# Altium PCB Bicikli_V1.PcbDoc (part 2 of 2)
Units mil, origin at the board's own origin, x right, y up, seen from the top; angles counter-clockwise.
Board outline 8366.14 x 3818.9 mil, 2 copper layers (Top Layer, Bottom Layer); 165 components, 79 nets, 501 pads, 940 vias.
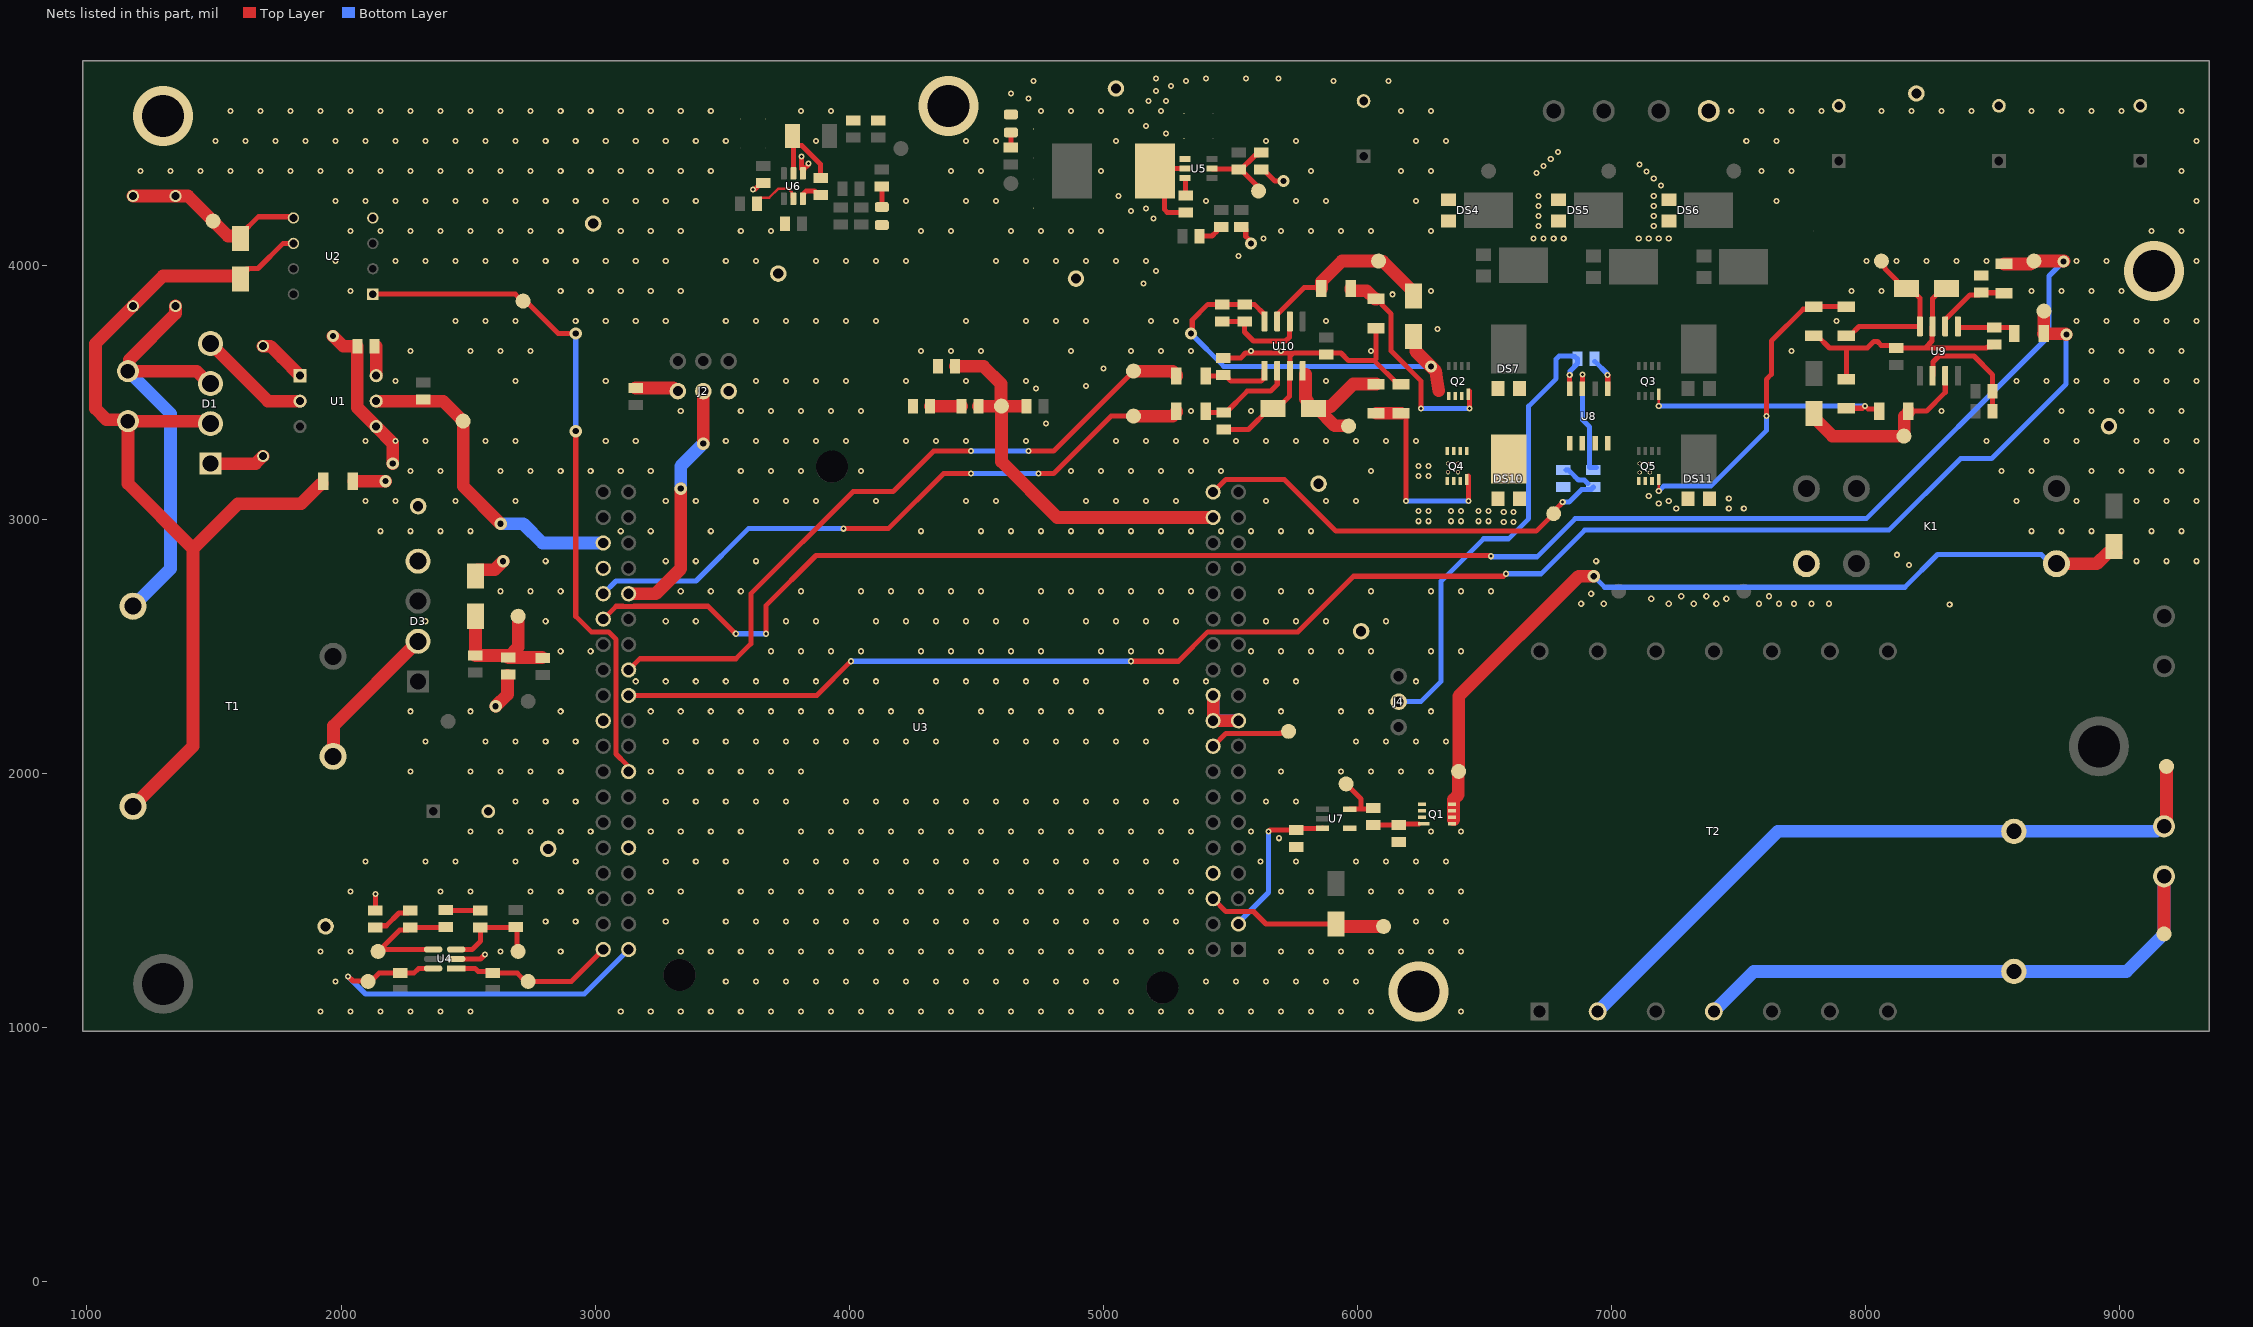
[diagram p2: the nets of this part, all layers, seen from the top]

## Via types
v1: diameter 24, hole 12, Top Layer to Bottom Layer, tented both sides, 820 vias
v2: diameter 24, hole 12, Top Layer to Bottom Layer, 55 vias
v3: diameter 48, hole 24, Top Layer to Bottom Layer, 52 vias
v4: diameter 17, hole 12, Top Layer to Bottom Layer, 8 vias
v5: diameter 236.22, hole 165.35, Top Layer to Bottom Layer, 4 vias
v6: diameter 48, hole 24, Top Layer to Bottom Layer, tented top, 1 vias

## Nets (pads, with @x,y where several pads share a name; then routed paths per layer and width w, separated by ;. In a path a pad name is that pad's centre, name@x,y a point inside that pad or via, vN(x,y) a via of type N, cw(c..) or ccw(c..) an arc to the next point about the centre after c; other vN are vias at no path point) (continued)
GND: C1.2 C3.1 C4.1 C5.1 C6.1 C8.1 C9.1 C11.1 C12.1 C13.1 C14.2 C15.2 C16.2 C21.1 C22.1 C23.1 C24.1 C25.1 C26.1 C27.1 C28.1 C30.1 C31.1 C32.1 C33.2 D3.4 D4.1 D7.1 D8.1 DS4.1 DS4.2 DS5.1 DS5.2 DS6.1 DS6.2 DS10.1 DS10.2 DS11.1 DS11.2 J2.3 J6.2 LED1.1 LED2.1 pad.0@1938.98,1397.64 pad.0@2303.15,3051.18 pad.0@2814.96,1702.76 pad.0@2992.13,4163.39 pad.0@3720.47,3966.54 pad.0@4891.73,3946.85 pad.0@5049.21,4694.88 pad.0@5846.46,3139.76 pad.0@6013.78,2559.06 pad.0@8198.82,4675.2 pad.0@8956.69,3366.14 Q1.1 Q1.2 Q1.3 Q4.1 Q4.2 Q4.3 Q5.1 Q5.2 Q5.3 R2.1 R6.1 R14.1 R17.1 R22.1 R23.1 R28.1 R31.1 R34.1 R35.1 R36.1 R39.1 R40.1 R47.1 R48.1 U1.4 U2.4 U3.CN7_8 U3.CN7_19 U3.CN7_20 U3.CN7_22 U3.CN10_9 U3.CN10_20 U3.CN10_32 U4.2 U5.4 U6.1 U7.4 U8.5 U9.7 U10.7 | length 4630.1
  Top Layer w20: R14.1@2134.89,1459.6 2135.36,1460.07 v2@2135.36,1525.12 ; U4.2@2452.78,1269.69 2548.13,1269.69 v2@2565.85,1287.4 ; v1(3621,4297) 3621.77,4297.77 3627.49,4297.77 3652.56,4322.83 C13.1@3661.42,4322.83 ; v1(3811.53,4426.68) 3811.53,4378.83 3815.86,4374.49 U6.1@3818,4374.49 ; U6.1@3816.93,4360.43 3818,4361.5 U6.1@3818,4374.49 ; v1(3838.58,4399.61) 3837.82,4398.84 3837.82,4392.96 3832.15,4387.29 3830.8,4387.29 U6.1@3818,4374.49 ; C23.1@5471.5,3634.8 5540.31,3634.8 5559.06,3653.54 5745.38,3653.54 ; C24.1@5473.38,3353.39 5570.64,3353.39 5652.28,3435.04 D8.1@5668.03,3435.04 5683.78,3435.04 5732.28,3483.54 5732.28,3582.48 U10.7@5733.66,3583.86 5733.66,3641.83 5745.38,3653.54 ; R23.1@5541.28,4149.64 5550.13,4149.64 5559.82,4139.95 5559.82,4113.11 v3@5580.71,4092.22 ; R22.1@5620.02,4376.02 5628.87,4376.02 5674.18,4330.71 v3(5708.66,4330.71) ; R39.1@6072.83,3751.57 6072.83,3630.91 6065.94,3624.02 ; R47.1@6171.26,3531.89 6158.07,3531.89 6065.94,3624.02 ; v2(6984,3568) 6984.22,3567.78 6984.22,3512.99 U8.5@6984.45,3512.76 ; R48.1@7795.28,3721.73 7808.46,3721.73 7856.97,3673.23 7921.26,3673.23 ; R40.1@7923.23,3551.57 7923.23,3671.26 7921.26,3673.23 ; D7.1@8318.19,3907.48 8302.44,3907.48 8262.4,3867.44 U9.7@8262.4,3758.66 8260.59,3756.85 8260.59,3701.54 8233.46,3674.41 ; C22.1@8504.87,3688.04 8495.19,3678.35 8478.56,3678.35 8474.61,3674.41 8233.46,3674.41 ; 5745.38,3653.54 5935.04,3653.54 C27.1@5964.57,3624.02 6065.94,3624.02 ; 7921.26,3673.23 8005.91,3673.23 C28.1@8031.5,3698.82 8045.87,3698.82 8060.6,3684.09 8109.46,3684.09 C25.1@8119.14,3674.41 8233.46,3674.41
  Top Layer w50: v3(1968.5,3720.47) 2008.81,3680.17 R2.1@2064.02,3680.17 2064.02,3438.73 U1.4@2138.19,3364.57 2138.19,3364.16 2203.41,3298.94 v3(2203.41,3219.08) ; R6.1@2050,3149.49 v3@2175.08,3149.49 ; D4.1@2529.53,2776.85 2529.53,2792.6 2537.99,2801.06 2604.21,2801.06 v3(2637.8,2834.65) ; v3(2608.27,2263.78) 2654.87,2310.39 R17.1@2654.87,2385.28 ; U3.CN7_22@5431.5,2306.69 U3.CN7_20@5431.5,2206.69 U3.CN7_19@5531.5,2206.69
  Bottom Layer w20: C32.1@6932.04,3621.11 6933.02,3621.11 6983.23,3570.9 6983.23,3568.77 v2(6984,3568)
  Bottom Layer w50: U3.CN7_22@5431.5,2306.69 U3.CN7_20@5431.5,2206.69 U3.CN7_19@5531.5,2206.69
  other v1: 1919.29,1062.99 2037.4,1062.99 2155.51,1062.99 2273.62,1062.99 2391.73,1062.99 2509.84,1062.99 3100.39,1062.99 3218.5,1062.99 3336.61,1062.99 3454.72,1062.99 3572.83,1062.99 3690.94,1062.99 3809.05,1062.99 3927.16,1062.99 4045.28,1062.99 4163.39,1062.99 4281.5,1062.99 4399.61,1062.99 4517.72,1062.99 4635.83,1062.99 4753.94,1062.99 4872.05,1062.99 4990.16,1062.99 5108.27,1062.99 5226.38,1062.99 5344.49,1062.99 5462.6,1062.99 5580.71,1062.99 5698.82,1062.99 5816.93,1062.99 5935.04,1062.99 6053.15,1062.99 6407.48,1062.99 1978.35,1181.1 3513.78,1181.1 3631.89,1181.1 3750,1181.1 3868.11,1181.1 3986.22,1181.1 4104.33,1181.1 4222.44,1181.1 4340.55,1181.1 4458.66,1181.1 4576.77,1181.1 4694.88,1181.1 4812.99,1181.1 4931.1,1181.1 5049.21,1181.1 5403.54,1181.1 5521.65,1181.1 5639.76,1181.1 5757.87,1181.1 5875.98,1181.1 5994.09,1181.1 1919.29,1299.21 2037.4,1299.21 2627.95,1299.21 2864.17,1299.21 3336.61,1299.21 3454.72,1299.21 3572.83,1299.21 3690.94,1299.21 3809.05,1299.21 3927.16,1299.21 4045.28,1299.21 4163.39,1299.21 4281.5,1299.21 4399.61,1299.21 4517.72,1299.21 4635.83,1299.21 4753.94,1299.21 4872.05,1299.21 4990.16,1299.21 5108.27,1299.21 5226.38,1299.21 5344.49,1299.21 5698.82,1299.21 5816.93,1299.21 5935.04,1299.21 6053.15,1299.21 6171.26,1299.21 6289.37,1299.21 6407.48,1299.21 2805.12,1417.32 2923.23,1417.32 3277.56,1417.32 3513.78,1417.32 3631.89,1417.32 3750,1417.32 3868.11,1417.32 3986.22,1417.32 4104.33,1417.32 4222.44,1417.32 4340.55,1417.32 4458.66,1417.32 4576.77,1417.32 4694.88,1417.32 4812.99,1417.32 4931.1,1417.32 5049.21,1417.32 5167.32,1417.32 5285.43,1417.32 6230.31,1417.32 6348.42,1417.32 2037.4,1535.43 2391.73,1535.43 2509.84,1535.43 2746.06,1535.43 2864.17,1535.43 2982.28,1535.43 3218.5,1535.43 3336.61,1535.43 3572.83,1535.43 3690.94,1535.43 3809.05,1535.43 3927.16,1535.43 4045.28,1535.43 4163.39,1535.43 4281.5,1535.43 4399.61,1535.43 4517.72,1535.43 4635.83,1535.43 4753.94,1535.43 4872.05,1535.43 4990.16,1535.43 5108.27,1535.43 5226.38,1535.43 5344.49,1535.43 5580.71,1535.43 5698.82,1535.43 5816.93,1535.43 6053.15,1535.43 6171.26,1535.43 6289.37,1535.43 6407.48,1535.43 2096.46,1653.54 2332.68,1653.54 2450.79,1653.54 2687.01,1653.54 2923.23,1653.54 3277.56,1653.54 3395.67,1653.54 3513.78,1653.54 3750,1653.54 3868.11,1653.54 3986.22,1653.54 4104.33,1653.54 4222.44,1653.54 4340.55,1653.54 4458.66,1653.54 4576.77,1653.54 4694.88,1653.54 4812.99,1653.54 4931.1,1653.54 5049.21,1653.54 5167.32,1653.54 5285.43,1653.54 5617.61,1653.54 5757.87,1653.54 5994.09,1653.54 6112.2,1653.54 6230.31,1653.54 6348.42,1653.54 5690.95,1744.62 2509.84,1771.65 2627.95,1771.65 2746.06,1771.65 2864.17,1771.65 2982.28,1771.65 3218.5,1771.65 3336.61,1771.65 3454.72,1771.65 3572.83,1771.65 3809.05,1771.65 3927.16,1771.65 4045.28,1771.65 4163.39,1771.65 4281.5,1771.65 4399.61,1771.65 4517.72,1771.65 4635.83,1771.65 4753.94,1771.65 4872.05,1771.65 4990.16,1771.65 5108.27,1771.65 5226.38,1771.65 5344.49,1771.65 5580.71,1771.65 6289.37,1771.65 6407.48,1771.65 2687.01,1889.76 2805.12,1889.76 2923.23,1889.76 3277.56,1889.76 3395.67,1889.76 3513.78,1889.76 3631.89,1889.76 3750,1889.76 3986.22,1889.76 4104.33,1889.76 4222.44,1889.76 4340.55,1889.76 4458.66,1889.76 4576.77,1889.76 4694.88,1889.76 4812.99,1889.76 4931.1,1889.76 5049.21,1889.76 5167.32,1889.76 5285.43,1889.76 5639.76,1889.76 5757.87,1889.76 2273.62,2007.87 2509.84,2007.87 2627.95,2007.87 2746.06,2007.87 2864.17,2007.87 3218.5,2007.87 3336.61,2007.87 3454.72,2007.87 3572.83,2007.87 3690.94,2007.87 3809.05,2007.87 5698.82,2007.87 5935.04,2007.87 6053.15,2007.87 6171.26,2007.87 6289.37,2007.87 2332.68,2125.98 2568.9,2125.98 2687.01,2125.98 2805.12,2125.98 2923.23,2125.98 3277.56,2125.98 3395.67,2125.98 3513.78,2125.98 3631.89,2125.98 3750,2125.98 3868.11,2125.98 3986.22,2125.98 4104.33,2125.98 4222.44,2125.98 4340.55,2125.98 4576.77,2125.98 4694.88,2125.98 4812.99,2125.98 4931.1,2125.98 5049.21,2125.98 5167.32,2125.98 5994.09,2125.98 6112.2,2125.98 6230.31,2125.98 6348.42,2125.98 2273.62,2244.09 2509.84,2244.09 2864.17,2244.09 3218.5,2244.09 3336.61,2244.09 3454.72,2244.09 3572.83,2244.09 3690.94,2244.09 3809.05,2244.09 3927.16,2244.09 4045.28,2244.09 4163.39,2244.09 4281.5,2244.09 4517.72,2244.09 4635.83,2244.09 4753.94,2244.09 4872.05,2244.09 4990.16,2244.09 5226.38,2244.09 5344.49,2244.09 5698.82,2244.09 5935.04,2244.09 6053.15,2244.09 6289.37,2244.09 3159.45,2362.21 3277.56,2362.21 3395.67,2362.21 3513.78,2362.21 3631.89,2362.21 3750,2362.21 3868.11,2362.21 3986.22,2362.21 4104.33,2362.21 4340.55,2362.21 4458.66,2362.21 4576.77,2362.21 4694.88,2362.21 4812.99,2362.21 4931.1,2362.21 5167.32,2362.21 5285.43,2362.21 5403.54,2362.21 5639.76,2362.21 5757.87,2362.21 6230.31,2362.21 2864.17,2480.32 2982.28,2480.32 3690.94,2480.32 3809.05,2480.32 3927.16,2480.32 4045.28,2480.32 4281.5,2480.32 4399.61,2480.32 4517.72,2480.32 4635.83,2480.32 4753.94,2480.32 4990.16,2480.32 5108.27,2480.32 5226.38,2480.32 5580.71,2480.32 5698.82,2480.32 5816.93,2480.32 5935.04,2480.32 6053.15,2480.32 6289.37,2480.32 6407.48,2480.32 2332.68,2598.43 2805.12,2598.43 3277.56,2598.43 3395.67,2598.43 3750,2598.43 3868.11,2598.43 4104.33,2598.43 4222.44,2598.43 4340.55,2598.43 4458.66,2598.43 4576.77,2598.43 4694.88,2598.43 4931.1,2598.43 5049.21,2598.43 5167.32,2598.43 5285.43,2598.43 5639.76,2598.43 5757.87,2598.43 5875.98,2598.43 6112.2,2598.43 8330,2664 6879.92,2667.32 6968.5,2667.32 7224.41,2667.32 7322.83,2667.32 7411.42,2667.32 7578.74,2667.32 7657.48,2667.32 7716.54,2667.32 7785.43,2667.32 7854.33,2667.32 7155.51,2687.01 7450.79,2687.01 7273.62,2696.85 7372.05,2696.85 7618.11,2696.85 6919.29,2706.69 2627.95,2716.54 2746.06,2716.54 2864.17,2716.54 3336.61,2716.54 3454.72,2716.54 3572.83,2716.54 3809.05,2716.54 4045.28,2716.54 4163.39,2716.54 4281.5,2716.54 4399.61,2716.54 4517.72,2716.54 4753.94,2716.54 4872.05,2716.54 4990.16,2716.54 5108.27,2716.54 5226.38,2716.54 5344.49,2716.54 5698.82,2716.54 5816.93,2716.54 6053.15,2716.54 6289.37,2716.54 6407.48,2716.54 6525.59,2716.54 8169,2820 2805.12,2834.65 3277.56,2834.65 3395.67,2834.65 3631.89,2834.65 6938.98,2834.65 9064.96,2834.65 9183.07,2834.65 9301.18,2834.65 8122,2860 2155.51,2952.76 2273.62,2952.76 2391.73,2952.76 2509.84,2952.76 3100.39,2952.76 3218.5,2952.76 3454.72,2952.76 4281.5,2952.76 4517.72,2952.76 4635.83,2952.76 4753.94,2952.76 4872.05,2952.76 4990.16,2952.76 5108.27,2952.76 5226.38,2952.76 5344.49,2952.76 5462.6,2952.76 5580.71,2952.76 5698.82,2952.76 5816.93,2952.76 8651.57,2952.76 8769.68,2952.76 8887.79,2952.76 9124.01,2952.76 9242.12,2952.76 2096.46,3070.87 2214.57,3070.87 2450.79,3070.87 2687.01,3070.87 3277.56,3070.87 3395.67,3070.87 3631.89,3070.87 3750,3070.87 3868.11,3070.87 4104.33,3070.87 4458.66,3070.87 4576.77,3070.87 4931.1,3070.87 5049.21,3070.87 5167.32,3070.87 5285.43,3070.87 5639.76,3070.87 5875.98,3070.87 5994.09,3070.87 8592.52,3070.87 8828.74,3070.87 9064.96,3070.87 9183.07,3070.87 9301.18,3070.87 2273.62,3188.98 2391.73,3188.98 2627.95,3188.98 2746.06,3188.98 2864.17,3188.98 2982.28,3188.98 3100.39,3188.98 3218.5,3188.98 3572.83,3188.98 3690.94,3188.98 3809.05,3188.98 4045.28,3188.98 4872.05,3188.98 4990.16,3188.98 5108.27,3188.98 5226.38,3188.98 5344.49,3188.98 5462.6,3188.98 6053.15,3188.98 8533.46,3188.98 8651.57,3188.98 8887.79,3188.98 9005.9,3188.98 9124.01,3188.98 9242.12,3188.98 2096.46,3307.09 2214.57,3307.09 2332.68,3307.09 2568.9,3307.09 2687.01,3307.09 3041.34,3307.09 3159.45,3307.09 3513.78,3307.09 3631.89,3307.09 3750,3307.09 3868.11,3307.09 3986.22,3307.09 4222.44,3307.09 4340.55,3307.09 4458.66,3307.09 4694.88,3307.09 5049.21,3307.09 5167.32,3307.09 5285.43,3307.09 5403.54,3307.09 5521.65,3307.09 5639.76,3307.09 5757.87,3307.09 5875.98,3307.09 5994.09,3307.09 6112.2,3307.09 6230.31,3307.09 8474.41,3307.09 8710.63,3307.09 8828.74,3307.09 9064.96,3307.09 9183.07,3307.09 9301.18,3307.09 4773.62,3375.98 3336.61,3425.2 3572.83,3425.2 3690.94,3425.2 3809.05,3425.2 3927.16,3425.2 4045.28,3425.2 5344.49,3425.2 5580.71,3425.2 8297.24,3425.2 8769.68,3425.2 8887.79,3425.2 9005.9,3425.2 9124.01,3425.2 9242.12,3425.2 4734.25,3513.78 4931.1,3523.62 2214.57,3543.31 2687.01,3543.31 3041.34,3543.31 3631.89,3543.31 3750,3543.31 3868.11,3543.31 3986.22,3543.31 4222.44,3543.31 4458.66,3543.31 4694.88,3543.31 5875.98,3543.31 8592.52,3543.31 8710.63,3543.31 8828.74,3543.31 8946.85,3543.31 9064.96,3543.31 9183.07,3543.31 9301.18,3543.31 5000,3592.52 2273.62,3661.42 2509.84,3661.42 2627.95,3661.42 2746.06,3661.42 4281.5,3661.42 4399.61,3661.42 4517.72,3661.42 4872.05,3661.42 5108.27,3661.42 5226.38,3661.42 5344.49,3661.42 5580.71,3661.42 5698.82,3661.42 6053.15,3661.42 7706.69,3661.42 8887.79,3661.42 9005.9,3661.42 9124.01,3661.42 9242.12,3661.42 6315,3749 2450.79,3779.53 2568.9,3779.53 2687.01,3779.53 2923.23,3779.53 3041.34,3779.53 3159.45,3779.53 3277.56,3779.53 3513.78,3779.53 3631.89,3779.53 3750,3779.53 3868.11,3779.53 3986.22,3779.53 4104.33,3779.53 4458.66,3779.53 4694.88,3779.53 4812.99,3779.53 4931.1,3779.53 5187.01,3779.53 5285.43,3779.53 5875.98,3779.53 7883.86,3779.53 8828.74,3779.53 8946.85,3779.53 9064.96,3779.53 9183.07,3779.53 9301.18,3779.53 6138,3885 2037.4,3897.64 2864.17,3897.64 2982.28,3897.64 3100.39,3897.64 3218.5,3897.64 3336.61,3897.64 6289.37,3897.64 7942.91,3897.64 8061.02,3897.64 8651.57,3897.64 8769.68,3897.64 8887.79,3897.64 9005.9,3897.64 5157.48,3927.17 5206.69,3976.38 1978.35,4015.75 2214.57,4015.75 2332.68,4015.75 2450.79,4015.75 2568.9,4015.75 2687.01,4015.75 2805.12,4015.75 2923.23,4015.75 3041.34,4015.75 3159.45,4015.75 3277.56,4015.75 3513.78,4015.75 3631.89,4015.75 3868.11,4015.75 3986.22,4015.75 4104.33,4015.75 4222.44,4015.75 4576.77,4015.75 4694.88,4015.75 4812.99,4015.75 4931.1,4015.75 5049.21,4015.75 5167.32,4015.75 8001.97,4015.75 8120.08,4015.75 8238.19,4015.75 8356.3,4015.75 8474.41,4015.75 8828.74,4015.75 8946.85,4015.75 9301.18,4015.75 5531.5,4035.43 5629.92,4104.33 6692.91,4104.33 6732.28,4104.33 6771.65,4104.33 6811.02,4104.33 7106.3,4104.33 7145.67,4104.33 7185.04,4104.33 7224.41,4104.33 2037.4,4133.86 2155.51,4133.86 2273.62,4133.86 2391.73,4133.86 2509.84,4133.86 2627.95,4133.86 2746.06,4133.86 2864.17,4133.86 3100.39,4133.86 3218.5,4133.86 3336.61,4133.86 3572.83,4133.86 3690.94,4133.86 4281.5,4133.86 4399.61,4133.86 4635.83,4133.86 4753.94,4133.86 4872.05,4133.86 4990.16,4133.86 5698.82,4133.86 5816.93,4133.86 5935.04,4133.86 6053.15,4133.86 6289.37,4133.86 9124.01,4133.86 9242.12,4133.86 6712.6,4153.54 7165.35,4153.54 5196.85,4183.07 6712.6,4192.91 7165.35,4192.91 5108.27,4212.6 5167.32,4222.44 6712.6,4232.28 7165.35,4232.28 1978.35,4251.97 2096.46,4251.97 2214.57,4251.97 2332.68,4251.97 2450.79,4251.97 2568.9,4251.97 2687.01,4251.97 2805.12,4251.97 2923.23,4251.97 3041.34,4251.97 3159.45,4251.97 3277.56,4251.97 3395.67,4251.97 4222.44,4251.97 4458.66,4251.97 4576.77,4251.97 5403.54,4251.97 5757.87,4251.97 5875.98,4251.97 6230.31,4251.97 7647.64,4251.97 9301.18,4251.97 5059.06,4271.65 6712.6,4271.65 7165.35,4271.65 7193.19,4312.71 7165.35,4340.55 6704.44,4361.92 7137.52,4368.39 1210.63,4370.08 1328.74,4370.08 1446.85,4370.08 1564.96,4370.08 1683.07,4370.08 1801.18,4370.08 1919.29,4370.08 2037.4,4370.08 2155.51,4370.08 2273.62,4370.08 2391.73,4370.08 2509.84,4370.08 2627.95,4370.08 2746.06,4370.08 2864.17,4370.08 2982.28,4370.08 3100.39,4370.08 3218.5,4370.08 3336.61,4370.08 3454.72,4370.08 4399.61,4370.08 4517.72,4370.08 4990.16,4370.08 5816.93,4370.08 6171.26,4370.08 6289.37,4370.08 7588.58,4370.08 7706.69,4370.08 9242.12,4370.08 6732.28,4389.76 7109.68,4396.23 6760.12,4417.6 6787.96,4445.44 1505.91,4488.19 1624.02,4488.19 1742.13,4488.19 1860.24,4488.19 1978.35,4488.19 2096.46,4488.19 2214.57,4488.19 2332.68,4488.19 2450.79,4488.19 2568.9,4488.19 2687.01,4488.19 2805.12,4488.19 2923.23,4488.19 3041.34,4488.19 3159.45,4488.19 3277.56,4488.19 3395.67,4488.19 3513.78,4488.19 3868.11,4488.19 4458.66,4488.19 4576.77,4488.19 5049.21,4488.19 5639.76,4488.19 5757.87,4488.19 6230.31,4488.19 6348.42,4488.19 7529.53,4488.19 7647.64,4488.19 9301.18,4488.19 5246.06,4517.72 5167.32,4547.24 1564.96,4606.3 1683.07,4606.3 1801.18,4606.3 1919.29,4606.3 2037.4,4606.3 2155.51,4606.3 2273.62,4606.3 2391.73,4606.3 2509.84,4606.3 2627.95,4606.3 2746.06,4606.3 2864.17,4606.3 2982.28,4606.3 3100.39,4606.3 3218.5,4606.3 3336.61,4606.3 3454.72,4606.3 3809.05,4606.3 3927.16,4606.3 4753.94,4606.3 4872.05,4606.3 4990.16,4606.3 5108.27,4606.3 5226.38,4606.3 6171.26,4606.3 6289.37,4606.3 7470.47,4606.3 7588.58,4606.3 7706.69,4606.3 7824.8,4606.3 8061.02,4606.3 8179.13,4606.3 8297.24,4606.3 8415.35,4606.3 8651.57,4606.3 8769.68,4606.3 8887.79,4606.3 9005.9,4606.3 9242.12,4606.3 5177.17,4645.67 5246.06,4645.67 4704.72,4655.51 4635.83,4675.2 5206.69,4685.04 5265.75,4704.72 4724.41,4724.41 5324.8,4724.41 5905.51,4724.41 6122.05,4724.41 5206.69,4734.25 5403.54,4734.25 5561.02,4734.25 5688.98,4734.25
  other v2: 2566.93,1287.4 2135.83,1525.59 6575,2989 6614,2989 6240.16,2992.13 6279.53,2992.13 6368.11,2992.13 6407.48,2992.13 6476.38,2992.13 6515.75,2992.13 6575,3028 6614,3028 6240.16,3031.5 6279.53,3031.5 6368.11,3031.5 6407.48,3031.5 6476.38,3031.5 6515.75,3031.5 7253.94,3041.34 7460.63,3041.34 7519.69,3041.34 7185.04,3061.02 7224.41,3070.87 7460.63,3080.71 7145.67,3090.55 6240.16,3169.29 6279.53,3169.29 6240.16,3208.66 6279.53,3208.66
  other v3: 2175.2,3149.61 5580.71,4084.65
  other v4: 7110,3184 7150,3184 6356,3185 6395,3185 6356,3219 6396,3219 7110,3219 7151,3219
  other v5: 6240.16,1141.73 9133.86,3976.38 1299.21,4586.61 4389.76,4625.98
GridTie: J2.2 U3.CN10_29 | length 981.4
  Top Layer w50: U3.CN10_29@3131.5,2706.69 3238.19,2706.69 3336.61,2805.12 v3(3336.61,3120.08) ; v3(3425.2,3297.24) J2.2@3425.2,3503.94
  Bottom Layer w50: v3(3336.61,3120.08) 3336.61,3208.66 v3(3425.2,3297.24)
HallIN+: C19.1 C20.1 D6.1 DS7.1 DS7.2 DS10.3 pad.5@6338.58,3375.98 Q2.1 Q2.2 Q2.3 Q4.5 Q4.6 Q4.7 Q4.8 U8.1 U8.2 U10.4 | length 1656.8
  Top Layer w20: v3(5344.49,3730.32) 5349.28,3735.1 5349.28,3784.32 5410.57,3845.61 C19.1@5467.37,3845.61 5593.37,3845.61 5633.66,3805.32 U10.4@5633.66,3778.35
  Top Layer w50: D6.1@6220.47,3719.21 6228.94,3710.75 6228.94,3660.83 6307.36,3582.4 6311.87,3553.47 6319,3506
  Bottom Layer w20: v3(5344.49,3730.32) 5473.43,3601.38 v3(6288.39,3601.38)
HallIN-: K1.4 U8.3 U8.4
HallSens: R33.1 R36.2 TP19.1 U3.CN7_38 | length 1797.8
  Top Layer w20: U3.CN7_38@5431.5,3106.69 5481.5,3156.69 5711.42,3156.69 5915.35,2952.76 6702.76,2952.76 6761.81,3011.81 6761.81,3021.65 6780.41,3021.65 6780.03,3022.04 6780.03,3038.79 6807.09,3065.85 v2(6807.09,3066.93)
  Bottom Layer w20: v2@6808.17,3066.93 6808.93,3067.69 6832.35,3067.69 6881.99,3117.33 6918.51,3117.33 R33.1@6928.2,3127.02 ; R36.2@6819.93,3193.95 6828.79,3193.95 6856.03,3166.7 6856.76,3166.7 6869.2,3154.26 6892.09,3154.26 R33.1@6905.72,3140.64
"HO L": D6.2 R37.1 TP21.1 U10.3 | length 735.3
  Top Layer w20: U10.3@5683.66,3778.35 5683.66,3805.32 5701.85,3823.5 5701.85,3823.68 5790.18,3912.01 R37.1@5857.87,3912.01
  Top Layer w50: R37.1@5857.87,3907.48 5857.87,3934.87 5938.75,4015.75 TP21.1@6082.68,4015.75 6084.41,4014.02 6100.16,4014.02 6220.47,3893.7 D6.2@6220.47,3877.95
"HO R": D5.2 R38.2 TP20.1 U9.3 | length 759.6
  Top Layer w20: R38.2@8167.72,3412.01 R38.2@8167.72,3425.2 8238.19,3425.2 8312.4,3499.41 U9.3@8312.4,3564.17
  Top Layer w50: D5.2@7795.28,3415.35 7795.28,3399.61 7868.11,3326.77 TP20.1@8149.61,3326.77 8151.34,3328.5 8151.34,3404.29 8167.72,3420.67 R38.2@8167.72,3425.2
"LO L": D8.2 R45.1 TP27.1 U10.8 | length 594.1
  Top Layer w50: U10.8@5795.28,3570.08 5795.28,3472.79 5802.56,3465.51 5802.56,3443.5 5811.02,3435.04 D8.2@5826.77,3435.04 5835.24,3443.5 5894.29,3443.5 5982.68,3531.89 R45.1@6072.83,3531.89 ; D8.2@5842.52,3435.04 5909.68,3367.87 5962.83,3367.87 TP27.1@5964.57,3366.14
"LO R": D7.2 R46.2 TP26.1 U9.8 | length 642.7
  Top Layer w20: R46.2@7923.23,3721.73 7936.42,3721.73 7973.35,3758.66 U9.8@8212.4,3758.66 8212.4,3870.28 8175.2,3907.48 8143.7,3907.48 8120.24,3930.94 8120.24,3940.79 8075.24,3985.78 8075.24,3990.96 8061.02,4005.18 TP26.1@8061.02,4015.75
NetC2_1: C2.1 U5.6 | length 77.9
  Top Layer w20: U5.6@5312.33,4342.52 U5.6@5320.87,4342.52 ; U5.6@5320.56,4342.52 5322.37,4340.71 5322.37,4276.06 C2.1@5323.87,4274.56
NetC2_2: C2.2 L1.2 U5.5 | length 378.7
  Top Layer w20: U5.5@5320.87,4379.92 5211.71,4379.92 L1.2@5201.87,4370.08 5239.32,4332.63 5239.32,4219.35 5251.03,4207.63 C2.2@5323.87,4207.63
NetC7_2: C7.2 U6.6 | length 98
  Top Layer w20: U6.6@3816.93,4261.61 3818.54,4263.23 3818.54,4279.62 3830.26,4291.34 3863.19,4291.34 3878,4276.53 C7.2@3886.86,4276.53
NetC17_2: C17.2 C18.2 U9.2 | length 473.8
  Top Layer w20: U9.2@8262.4,3564.17 8264.21,3565.98 8264.21,3618.54 8287.4,3641.73 8425.2,3641.73 8499.06,3567.87 C18.2@8499.06,3424.26
NetC19_2: C19.2 C20.2 U10.2 | length 390.5
  Top Layer w20: C19.2@5467.37,3778.68 5467.76,3778.3 5554.64,3778.3 C20.2@5555.02,3777.91 5555.02,3736.32 5590.55,3700.79 5716.63,3700.79 5731.85,3716.01 5731.85,3776.54 U10.2@5733.66,3778.35
NetC21_2: C21.2 R42.1 U9.6 | length 303.7
  Top Layer w20: U9.6@8312.4,3758.66 8312.4,3785.63 8330.59,3803.82 8330.59,3804 8409.58,3882.98 8444.1,3882.98 C21.2@8453.79,3892.67 8455.44,3891.02 8541.66,3891.02 R42.1@8543.31,3889.37
NetC22_2: C22.2 R41.1 U9.5 | length 242.4
  Top Layer w20: U9.5@8362.4,3758.66 8362.4,3756.78 8364.21,3754.97 C22.2@8504.87,3754.97 8572.79,3754.97 8584.25,3743.5 R41.1@8584.25,3730.32
NetC23_2: C23.2 R43.2 U10.5 | length 276.3
  Top Layer w20: R43.2@5401.97,3562.99 C23.2@5471.5,3562.99 ; C23.2@5471.5,3567.87 5480.36,3567.87 5490.05,3558.18 5490.05,3555.02 5501.76,3543.31 5620.13,3543.31 5631.85,3555.02 5631.85,3582.05 U10.5@5633.66,3583.86
NetC24_2: C24.2 R44.2 U10.6 | length 383
  Top Layer w20: R44.2@5401.97,3425.2 5406.84,3420.32 C24.2@5473.38,3420.32 5482.24,3420.32 5565.85,3503.94 5657.58,3503.94 5683.66,3530.02 U10.6@5683.66,3583.86
NetC29_1: C29.1 J8.1 T2.2 TP30.1 | length 2767.9
  Top Layer w50: J8.1@9173.23,1791.34 9180.23,1798.34 9180.23,1824.23 9183.07,1827.07 TP30.1@9183.07,2025.11
  Bottom Layer w50: T2.2@6944.88,1062.99 7653.54,1771.65 C29.1@8582.68,1771.65 9143.64,1771.65 9163.32,1791.34 J8.1@9173.23,1791.34
NetC29_2: C29.2 J8.2 T2.4 TP28.1 | length 2350.8
  Top Layer w50: TP28.1@9173.23,1368.11 J8.2@9173.23,1594.49
  Bottom Layer w50: T2.4@7401.57,1062.99 7559.06,1220.47 C29.2@8582.68,1220.47 9025.59,1220.47 9173.23,1368.11 J8.2@9173.23,1594.49
NetC32_2: C32.2 J4.2 U8.8 | length 1954.5
  Top Layer w20: U8.8@6834.45,3530.51 U8.8@6834.45,3512.76 6834.55,3512.86 v2@6834.55,3566.83
  Bottom Layer w20: J4.2@6161.42,2281.89 6248.43,2281.89 6328.74,2362.2 6328.74,2755.91 6496.06,2923.23 6594.49,2923.23 6673.23,3001.97 6673.23,3444.88 6781.5,3553.15 6781.5,3630.02 6793.21,3641.73 6844.49,3641.73 6846.57,3639.65 6855.43,3639.65 6865.11,3629.97 6865.11,3621.11 6865.11,3612.25 6835.41,3582.55 6835.41,3567.69 v2(6834.65,3566.93)
NetD1_1: D1.1 R1.2 | length 219.3
  Top Layer w50: D1.1@1485.87,3218.5 1663.39,3218.5 R1.2@1692.91,3248.03
NetD1_4: D1.4 U1.2 | length 446.5
  Top Layer w50: D1.4@1485.87,3690.94 1712.24,3464.57 U1.2@1838.19,3464.57
  Bottom Layer w50: U1.2@1837.9,3464.28 U1.2@1838.19,3464.57
NetD3_2: D3.2 T1.7 | length 591.2
  Top Layer w50: T1.7@1968.5,2066.93 1970.06,2068.48 1970.06,2186.95 D3.2@2302.8,2519.69
NetD4_2: D4.2 R15.1 R16.1 R17.2 TP9.1 | length 603.4
  Top Layer w50: D4.2@2529.53,2618.11 2529.06,2617.64 2529.06,2464 R15.1@2528.59,2463.54 R17.2@2666.39,2463.54 ; TP9.1@2696.85,2618.11 2696.85,2495.96 2658.42,2457.53 R17.2@2658.42,2455.76 R16.1@2790.8,2455.76
NetD9_2: D9.2 TP32.1 U3.CN7_6 | length 715.5
  Top Layer w20: U3.CN7_6@5431.5,1506.69 5481.5,1456.69 5590.55,1456.69 5639.76,1407.48 D9.2@5915.35,1407.48
  Top Layer w50: D9.2@5915.35,1406.1 5923.82,1397.64 TP32.1@6102.36,1397.64
NetJ2_1: J2.1 R5.1 | length 172
  Top Layer w50: R5.1@3158.51,3516.68 3308.39,3516.68 3321.14,3503.94 J2.1@3325.2,3503.94
NetLED1_2: LED1.2 R20.1 | length 59.1
  Top Layer w20: R20.1@4635.89,4462.57 LED1.2@4635.86,4521.62
NetLED2_2: LED2.2 R27.1 | length 80.1
  Top Layer w20: LED2.2@4128,4228.43 R27.1@4128,4308.5
NetQ1_4: Q1.4 R30.2 R31.2 | length 199.3
  Top Layer w10: Q1.4@6241.46,1801.18 Q1.4@6259.84,1801.18
  Top Layer w20: R30.2@6062.06,1796.21 6062.1,1796.26 6162.31,1796.26 6165.93,1799.88 Q1.4@6241.46,1799.88
NetQ2_4: Q2.4 R37.2 R39.2 | length 890.8
  Top Layer w20: R39.2@6072.83,3866.54 6086.02,3866.54 6096.69,3855.87 6096.69,3842.68 6131.89,3807.48 6131.89,3661.42 6250,3543.31 v2(6250,3435.04) ; v2(6440,3435) Q2.4@6440,3503.61
  Top Layer w50: R37.2@5972.83,3907.48 5972.83,3902.95 5977.17,3898.62 6036.22,3898.62 6068.31,3866.54 R39.2@6072.83,3866.54
  Bottom Layer w20: v2(6250,3435.04) v2(6440,3435)
NetQ3_4: Q3.4 R38.1 R40.2 | length 997.5
  Top Layer w10: Q3.4@7184.06,3490.95 7184.06,3474.45 7185,3473.51 v2(7185,3445)
  Top Layer w20: R40.2@7923.23,3436.61 7986.71,3436.61 v2@7994.98,3444.88 ; v2(7996.06,3444.88) 7997.15,3444.88 8007.81,3434.21 8043.74,3434.21 R38.1@8052.76,3425.2
  Bottom Layer w20: v2(7185,3445) 7185.06,3444.94 7996,3444.94 v2(7996.06,3444.88)
NetQ4_4: Q4.4 R45.2 R47.2 | length 802.4
  Top Layer w20: R47.2@6171.26,3416.93 6180.28,3416.93 6190.94,3406.26 v2(6190.94,3070.87) ; v2(6437.01,3070.87) 6437.01,3169.29
  Top Layer w50: R45.2@6072.83,3416.93 R47.2@6171.26,3416.93
  Bottom Layer w20: v2(6190.94,3070.87) v2(6437.01,3070.87)
NetQ5_4: Q5.4 R46.1 R48.2 | length 1280.5
  Top Layer w10: Q5.4@7184.06,3156.3 7184.55,3155.81 7184.55,3110.73 v2(7185.04,3110.24)
  Top Layer w20: v2(7608.27,3405.51) 7608.27,3550.2 7627.95,3569.88 7627.95,3700.79 7753.19,3826.02 7784.61,3826.02 R48.2@7795.28,3836.69 R46.1@7923.23,3836.69
  Bottom Layer w20: v2(7185.04,3110.24) 7204.72,3129.92 7389.76,3129.92 7608.27,3348.43 v2(7608.27,3405.51)
NetR1_1: R1.1 U1.1 | length 193.5
  Top Layer w50: R1.1@1692.91,3681.1 1721.65,3681.1 1766.73,3636.03 U1.1@1838.19,3564.57
NetR2_2: R2.2 U1.6 | length 116.1
  Top Layer w50: U1.6@2138.19,3564.97 R2.2@2138.19,3681.1
NetR8_1: R8.1 R11.2 TP4.1 U4.3 | length 401.8
  Top Layer w20: U4.3@2452.78,1307.09 2515.75,1307.09 2548.28,1339.61 R11.2@2548.28,1392.67 2549.31,1393.7 2686.91,1393.7 R8.1@2687.94,1394.73 2692.4,1390.28 2692.4,1303.67 TP4.1@2696.85,1299.21
NetR11_1: R11.1 R12.2 | length 136.8
  Top Layer w20: R12.2@2412.35,1461.66 2413.39,1460.63 2547.24,1460.63 R11.1@2548.28,1459.6
NetR12_1: R12.1 R13.2 TP7.1 U4.4 | length 515.2
  Top Layer w20: TP7.1@2145.67,1299.21 TP7.1@2153.54,1307.09 ; U4.4@2362.2,1307.09 2176.91,1307.09 2176.51,1306.69 2153.94,1306.69 TP7.1@2153.54,1307.09 ; R12.1@2412.35,1394.73 2411.32,1393.7 2273.72,1393.7 R13.2@2272.68,1392.67 2263,1382.98 2229.44,1382.98 TP7.1@2153.54,1307.09
NetR13_1: R13.1 R14.2 | length 165.5
  Top Layer w20: R14.2@2134.89,1392.67 2142.55,1400.33 2177.89,1400.33 2227.47,1449.91 2263,1449.91 R13.1@2272.68,1459.6
NetR18_1: R18.1 R22.2 TP12.1 U5.2 | length 363.8
  Top Layer w10: TP12.1@5600.85,4315.46 5600.85,4300.72 TP12.1@5610.24,4291.34
  Top Layer w20: U5.2@5427.17,4379.92 5428.98,4378.11 5529.34,4378.11 R18.1@5531.43,4376.02 R18.1@5540.29,4376.02 ; TP12.1@5610.24,4291.34 5602.76,4298.81 5602.76,4313.54 R18.1@5540.29,4376.02 ; R22.2@5620.02,4442.94 5610.33,4433.26 5598.26,4433.26 5568.26,4403.26 5567.54,4403.26 R18.1@5540.29,4376.02
NetR19_1: R19.1 R21.1 | length 104.5
  Top Layer w20: R19.1@5377.92,4114.11 5427.01,4114.11 5443.99,4131.09 5443.99,4139.95 5453.68,4149.64 R21.1@5462.54,4149.64
NetR24_1: R24.1 U6.5 | length 201.5
  Top Layer w10: R24.1@3635.8,4242.06 3635.8,4250.92 3650.48,4265.61 3684.9,4265.61 3720.51,4301.22 3759.8,4301.22 3772.91,4288.11 3772.91,4268.23 U6.5@3779.53,4261.61
NetR30_1: R30.1 TP15.1 U7.5 | length 219.3
  Top Layer w20: TP15.1@5954.72,1958.66 6014.07,1899.32 6014.07,1858.87 ; U7.5@5969.35,1857.87 5970.35,1858.87 6014.07,1858.87 ; R30.1@6062.06,1863.14 6057.78,1858.87 6014.07,1858.87
NetR32_1: R32.1 R35.2 | length 123.4
  Top Layer w50: R35.2@4317.96,3443.94 4318.43,3444.41 4440.48,3444.41 R32.1@4440.94,3444.88
NetR33_2: R33.2 U8.7 | length 461.6
  Top Layer w20: U8.7@6884.45,3512.76 6884.55,3512.86 6884.55,3569.94 v2(6884.65,3570.04)
  Bottom Layer w20: v2(6884.65,3570.04) 6884.65,3390.94 6913.2,3362.39 6913.2,3203.63 R33.2@6939.18,3203.63
NetTP33_1: TP33.1 U3.CN7_18 | length 321.8
  Top Layer w20: U3.CN7_18@5431.5,2106.69 5482.28,2157.48 5510,2157.48 5510.79,2156.69 5552.21,2156.69 5552.99,2157.48 5697.1,2157.48 5697.5,2157.88 5720.87,2157.88 TP33.1@5728.35,2165.35
NULA: D1.2 D2.1 J1.1 R6.2 R7.1 T1.5 U2.6 | length 4028.8
  Top Layer w20: D2.1@1604.33,3945.59 1604.33,3961.34 1627.8,3984.8 1638.09,3984.8 1639.51,3986.22 1673.23,3986.22 1772.44,4085.43 U2.6@1812.2,4085.43
  Top Layer w50: T1.5@1181.1,1870.08 1186.23,1870.08 1191.77,1875.62 1191.77,1880.74 1417.32,2106.3 1417.32,2883.86 ; D1.2@1485.87,3375.98 1480.22,3375.98 1470.38,3385.83 J1.1@1161.42,3385.83 ; D2.1@1606.3,3956.69 1299.21,3956.69 R7.1@1181.1,3838.58 1033.46,3690.95 1033.46,3435.04 1077.18,3391.33 1155.92,3391.33 J1.1@1161.42,3385.83 ; R6.2@1926.38,3140.75 1922.05,3136.42 1918.08,3136.42 1842.69,3061.02 1594.49,3061.02 1417.32,2883.86 ; J1.1@1161.42,3385.83 1161.42,3139.76 1417.32,2883.86
OV: R10.1 TP6.1 U3.CN10_1 U4.6 | length 1567.8
  Top Layer w20: v2@2028.64,1200.79 2046.77,1182.66 2104.74,1182.66 TP6.1@2106.3,1181.1 2116.87,1181.1 2149.3,1213.54 R10.1@2233.32,1213.54 2286.37,1213.54 2305.12,1232.28 U4.6@2362.2,1232.28
  Bottom Layer w20: v2(2027.56,1200.79) 2096.46,1131.89 2956.69,1131.89 U3.CN10_1@3131.5,1306.69
Phase: D1.3 J1.2 R4.2 T1.1 | length 1733.9
  Top Layer w50: R4.2@1348.43,3838.58 1348.43,3809.06 1166.92,3627.55 1166.92,3588.18 J1.2@1161.42,3582.68 1431.01,3582.68 1480.22,3533.46 D1.3@1485.87,3533.46
  Bottom Layer w50: J1.2@1161.42,3582.68 1328.74,3415.35 1328.74,2805.12 T1.1@1181.1,2657.48
Phase_ADC: D2.2 R4.1 R7.2 TP2.1 U2.5 | length 758.4
  Top Layer w20: D2.2@1604.33,4104.33 1604.33,4120.08 1674.37,4190.12 1807.52,4190.12 U2.5@1812.2,4185.43
  Top Layer w50: R7.2@1181.1,4271.65 1338.58,4271.65 1397.64,4271.65 TP2.1@1496.06,4173.23 1555.12,4114.17 D2.2@1606.3,4114.17 ; D2.2@1604.33,4104.33 1604.33,4105.71 D2.2@1612.8,4114.17
Relay: DS9.1 K1.1 Q1.5 Q1.6 Q1.7 Q1.8 TP34.1 | length 3403.7
  Top Layer w50: 6377.33,1817.71 6377.33,1897.01 6395.91,1915.59 6395.91,2006.14 TP34.1@6397.64,2007.87 6397.64,2303.15 6870.08,2775.59 v3(6929.13,2775.59) ; K1.1@8750,2824.8 8908.74,2824.8 8952.17,2868.23 8967.91,2868.23 DS9.1@8976.38,2876.69 ; DS9.1@8976.38,2892.44 DS9.1@8976.38,2876.69 ; DS9.1@8984.84,2868.23 DS9.1@8976.38,2876.69
  Bottom Layer w20: v3(6929.13,2775.59) 6972.44,2732.28 8153.54,2732.28 8282.26,2861 8690.45,2861 8726.65,2824.8 K1.1@8750,2824.8
RelayST: R34.2 U3.CN7_3 U7.3 | length 630.7
  Top Layer w20: v2(5649.61,1771.65) 5650.69,1771.65 5655.66,1776.62 R34.2@5758.81,1776.62 5765.06,1782.87 5860.35,1782.87 U7.3@5861.35,1783.87
  Bottom Layer w20: U3.CN7_3@5531.5,1406.69 5531.5,1413.37 5649.61,1531.48 v2(5649.61,1771.65)
SW: C7.1 L2.2 U6.2 | length 314.9
  Top Layer w20: L2.2@3775.59,4494.09 L2.2@3775.59,4507.87 ; U6.2@3779.53,4360.43 3779.53,4470.47 3812.99,4470.47 3886.86,4396.61 C7.1@3886.86,4343.46
TIM1_CH1: R43.1 TP23.1 U3.CN10_23 | length 2768.7
  Top Layer w20: U3.CN10_23@3131.5,2406.69 3175.59,2450.79 3297.24,2450.79 3553.15,2450.79 3612.2,2509.84 3612.2,2706.69 4014.98,3109.47 4172.46,3109.47 4330.71,3267.72 v2(4478.35,3267.72) ; v2(4704.72,3267.72) 4803.15,3267.72 TP23.1@5118.11,3582.68
  Top Layer w50: TP23.1@5118.11,3582.68 5271.85,3582.68 5287.01,3567.52 R43.1@5287.01,3562.99
  Bottom Layer w20: v2(4478.35,3267.72) v2(4704.72,3267.72)
TIM1_CH1N: R44.1 TP25.1 U3.CN10_30 | length 2555.8
  Top Layer w20: v2(3976.38,2962.6) 4153.54,2962.6 4370.08,3179.13 v2(4478.35,3179.13) ; v2(4744.09,3179.13) 4803.15,3179.13 5029.53,3405.51 TP25.1@5118.11,3405.51
  Top Layer w50: TP25.1@5118.11,3405.51 5271.85,3405.51 5287.01,3420.67 R44.1@5287.01,3425.2
  Bottom Layer w20: U3.CN10_30@3031.5,2706.69 3081.5,2756.69 3396.46,2756.69 3602.36,2962.6 v2(3976.38,2962.6) ; v2(4478.35,3179.13) v2(4744.09,3179.13)
TIM1_CH2: R41.2 TP22.1 U3.CN10_21 | length 6539.6
  Top Layer w20: U3.CN10_21@3131.5,2306.69 3871.65,2306.69 v2(4005.91,2440.94) ; v2(5108.27,2440.94) 5295.04,2440.94 5410.79,2556.69 5765.35,2556.69 5984.25,2775.59 6574.8,2775.59 v2(6584.65,2785.43)
  Top Layer w50: TP22.1@8700.79,3818.9 8700,3818.11 8700,3731.1 R41.2@8699.21,3730.32 8785.43,3730.32 v3(8788.99,3726.76)
  Bottom Layer w20: v2(4005.91,2440.94) v2(5108.27,2440.94) ; v2(6584.65,2785.43) 6722.44,2785.43 6893.7,2956.69 8090.55,2956.69 8372.05,3238.19 8494.09,3238.19 8787.4,3531.5 8787.4,3725.18 v3(8788.99,3726.76)
TIM1_CH2N: R42.2 TP24.1 U3.CN10_28 | length 6866.7
  Top Layer w20: U3.CN10_28@3031.5,2606.69 3082.28,2657.48 3110,2657.48 3110.79,2656.69 3152.21,2656.69 3152.99,2657.48 3443.8,2657.48 3552.07,2549.21 v2(3553.15,2549.21) ; v2(3671.26,2549.21) 3671.26,2659.45 3868.5,2856.69 6522.15,2856.69 6524.51,2854.33 v2(6525.59,2854.33)
  Top Layer w50: R42.2@8543.31,4004.33 8647.55,4004.33 8658.97,4015.75 TP24.1@8661.42,4015.75 v3@8779.53,4015.75
  Bottom Layer w20: v2(3553.15,2549.21) v2(3671.26,2549.21) ; v2(6525.59,2854.33) 6527.56,2852.36 6706.69,2852.36 6856.3,3001.97 8001.97,3001.97 8720.47,3720.47 8720.47,3956.69 v3(8777.56,4013.78)
UV: R9.1 TP5.1 U3.CN10_2 U4.1 | length 651.9
  Top Layer w20: U4.1@2452.78,1232.28 2527.56,1232.28 2539.37,1220.47 2590.55,1220.47 R9.1@2597.49,1213.54 2693.22,1213.54 2725.65,1181.1 TP5.1@2736.22,1181.1 2905.91,1181.1 U3.CN10_2@3031.5,1306.69
VSens: C30.2 R29.1 R32.2 TP14.1 U3.CN7_36 | length 1617.8
  Top Layer w50: C30.2@4416.39,3601.43 4528.5,3601.43 4596.69,3533.23 4596.69,3446.61 TP14.1@4598.43,3444.88 ; R32.2@4507.87,3444.88 TP14.1@4598.43,3444.88 ; R29.1@4685.46,3444.88 TP14.1@4598.43,3444.88 ; U3.CN7_36@5431.5,3006.69 4818.11,3006.69 4598.43,3226.38 TP14.1@4598.43,3444.88
ZeroTrig: TP3.1 U2.1 U3.CN10_15 | length 2712.1
  Top Layer w20: U2.1@2124.8,3885.43 2685.29,3885.43 2712.46,3858.27 2726.38,3858.27 2854.33,3730.32 v3(2923.23,3730.32) ; v3(2923.23,3346.46) 2923.23,2618.11 2984.65,2556.69 3052.21,2556.69 3081.5,2527.4 3081.5,2075.98 3123.84,2033.64 3123.84,2014.35 U3.CN10_15@3131.5,2006.69
  Bottom Layer w20: v3(2923.23,3346.46) v3(2923.23,3730.32)
ZeroTrigOpto: R3.1 TP1.1 U1.5 U3.CN10_34 | length 1274.3
  Top Layer w50: U1.5@2138.19,3464.57 2401.57,3464.57 TP1.1@2480.32,3385.83 2480.32,3129.92 v3(2627.95,2982.28)
  Bottom Layer w50: v3(2627.95,2982.28) 2716.54,2982.28 2792.13,2906.69 U3.CN10_34@3031.5,2906.69
pads on no net: T2.1 T2.3 T2.5 T2.6 T2.7 T2.9 T2.11 T2.13 U1.3 U2.2 U2.3 U2.7 U3. U3.CN7_1 U3.CN7_2 U3.CN7_4 U3.CN7_5 U3.CN7_7 U3.CN7_9 U3.CN7_10 U3.CN7_11 U3.CN7_12 U3.CN7_13 U3.CN7_14 U3.CN7_15 U3.CN7_17 U3.CN7_21 U3.CN7_23 U3.CN7_24 U3.CN7_25 U3.CN7_26 U3.CN7_27 U3.CN7_28 U3.CN7_29 U3.CN7_30 U3.CN7_31 U3.CN7_32 U3.CN7_33 U3.CN7_34 U3.CN7_35 U3.CN7_37 U3.CN10_3 U3.CN10_4 U3.CN10_5 U3.CN10_6 U3.CN10_7 U3.CN10_8 U3.CN10_10 U3.CN10_11 U3.CN10_12 U3.CN10_13 U3.CN10_14 U3.CN10_16 U3.CN10_17 U3.CN10_18 U3.CN10_19 U3.CN10_22 U3.CN10_25 U3.CN10_26 U3.CN10_27 U3.CN10_31 U3.CN10_33 U3.CN10_35 U3.CN10_36 U3.CN10_37 U3.CN10_38 U7.1 U8.6

## Polygon pours and split planes (outlines as drawn)
GND on Top Layer "NONET_L03_P-001" (solid, remove dead copper, pour order 18): 1820.87,4330.71 1958.66,4192.91 1958.66,3661.42 2031.5,3588.58 2031.5,3037.4 2204.72,2864.17 2204.72,1830.71 1870.08,1496.06 1870.08,1023.62 6427.17,1023.62 6427.17,2204.72 6584.65,2411.42 6643.7,2500 6663.39,2519.68 6791.34,2647.64 8602.36,2647.64 8740.16,2785.43 9320.87,2785.43 9320.87,4763.78 1161.42,4763.78 1082.68,4685.04 1082.68,4399.61 1151.57,4330.71
+36V on Top Layer "NONET_L03_P-001" (solid, pour order 0): 6555.12,3917.32 6352.36,3714.57 6352.36,3572.83 6555.12,3572.83 7608.27,3572.83 7608.27,4055.12 7598.43,4064.96 6555.12,4064.96
BrRght on Top Layer "NONET_L03_P-001" (solid, pour order 1): 7450.79,3516.73 7699.8,3267.72 7805.12,3267.72 7854.33,3218.5 7854.33,3011.81 7578.74,3011.81 7450.79,3139.76 7244.09,3139.76 7204.72,3248.03 7076.77,3248.03 7076.77,3562.99 7450.79,3562.99
HallIN+ on Top Layer "NONET_L03_P-001" (solid, pour order 6): 6739,3310.21 6781.5,3267.72 6820.87,3307.09 6820.87,3326.77 6897.64,3326.77 6897.64,3236.22 6801.18,3139.76 6486.22,3139.76 6446.85,3248.03 6289.37,3248.03 6289.37,3562.99 6739,3562.99
HallIN- on Top Layer "NONET_L03_P-001" (solid, pour order 10): 7637.8,2763.78 7700.79,2700.79 7826.77,2700.79 7854.33,2728.35 7854.33,2929.13 7814.96,2968.5 7224.41,2968.5 7066.93,3125.98 7066.93,3275.59 7015.75,3326.77 6923.23,3326.77 6923.23,3226.38 6944.88,3204.72 6944.88,2905.51 7086.61,2763.78
24VAC- on Top Layer "NONET_L03_P-001" (solid, pour order 13): 7883.86,3218.5 7883.86,3011.81 8021.65,3011.81 8494.09,2539.37 9291.34,2539.37 9291.34,2716.54 9251.97,2755.91 8668.25,2755.91 8366.14,3218.5
24VAC- on Top Layer "NONET_L03_P-001" (solid, pour order 14): 8661.42,2017.72 8710.63,2066.93 8710.63,2185.04 8651.58,2244.09 7549.21,2244.09 7214.57,2578.74 6643.7,2578.74 6643.7,2125.98 6751.97,2017.72
24VAC+ on Top Layer "NONET_L03_P-001" (solid, pour order 12): 7883.86,2598.43 7854.33,2568.9 7578.74,2568.9 7519.69,2509.84 7519.69,2342.52 7570.3,2283.46 9251.97,2283.46 9251.97,2490.16 9232.28,2509.84 8435.04,2509.84 8031.5,2913.39 7883.86,2913.39
+36V on Top Layer "NONET_L03_P-001" (solid, pour order 8): 5413.39,4665.35 5393.7,4645.67 5393.7,4399.61 5462.6,4399.61 5482.28,4419.29 5561.02,4419.29 5561.02,4468.5 5482.28,4468.5 5482.28,4537.4 5511.81,4566.93 5786.09,4566.93 5905.51,4387.8 5905.51,4350.39 5925.2,4330.71 6112.2,4330.71 6132.29,4350.39 6133.31,4400.54 6132.08,4527.56 6112.2,4547.24 5993.13,4547.24 5909.64,4665.35
+36V on Top Layer "NONET_L03_P-001" (solid, pour order 11): 9104.33,4163.39 9183.07,4250.87 9183.07,4503.94 9143.7,4527.56 9124.02,4527.56 7785.43,4527.56 7755.91,4498.03 7755.91,4311.02 7500,4055.12 7500,3708.66 7606.3,3708.66 8061.02,4163.39
GND on Top Layer "NONET_L03_P-001" (solid, pour order 9): 5295.28,4405.51 5374.02,4405.51 5374.02,4724.41 5295.28,4724.41
12V_Buck on Top Layer "NONET_L03_P-001" (solid, pour order 7): 4803.15,4478.35 4606.3,4478.35 4606.3,4379.92 4606.3,4261.81 4803.15,4261.81
B on Top Layer "NONET_L03_P-001" (solid, pour order 4): 6830.71,4133.86 6899.61,4064.96 7057.09,4064.96 7057.09,4694.88 7027.56,4724.41 6870.08,4724.41 6870.08,4527.56 6830.71,4488.19
C on Top Layer "NONET_L03_P-001" (solid, pour order 5): 7273.62,4114.04 7322.7,4064.96 7490.16,4064.96 7539.37,4114.17 7539.37,4448.82 7450.79,4448.82 7283.46,4616.14 7283.46,4724.41 7096.46,4724.41 7096.46,4458.66 7273.62,4281.5
A on Top Layer "NONET_L03_P-001" (solid, pour order 2): 6407.48,3937.01 6515.75,3937.01 6525.59,3927.17 6545.28,3946.85 6545.28,4094.49 6624.02,4094.49 6673.23,4143.7 6673.23,4389.76 6860.24,4576.77 6860.24,4724.41 6446.85,4724.41 6407.48,4685.04
GND on Bottom Layer "NONET_L03_P-001" (solid, pour order 19): 1840.55,4330.71 1958.66,4212.6 1958.66,3661.42 2031.5,3588.58 2031.5,3037.4 2214.57,2854.33 2214.57,1840.55 1870.08,1496.06 1870.08,1023.62 6427.17,1023.62 6427.17,2242.86 6557.09,2413.39 6663.39,2519.68 6811.02,2647.64 8602.36,2647.64 8740.16,2785.43 9320.87,2785.43 9320.87,4763.78 1161.42,4763.78 1082.68,4685.04 1082.68,4399.61 1151.57,4330.71
24VAC- on Bottom Layer "NONET_L03_P-001" (solid, pour order 15): 8366.14,2785.43 8366.14,2066.93 8405.51,2027.56 8651.57,2027.56 8700.79,2076.77 8700.79,2746.06 8661.42,2785.43

## Keep-outs
Top Layer:
  region: 6751.97,3543.31 6751.97,3338.58 7066.93,3338.58 7066.93,3543.31
Keep-Out Layer:
  the board outline again, w7

## Other copper
Top Layer:
  region net HallIN+: 6299.21,3415.35 6299.21,3336.61 6377.95,3336.61 6377.95,3415.35
  region net 24VAC-: 8740.16,2637.8 8740.16,2559.06 8818.9,2559.06 8818.9,2637.8
  region net 24VAC+: 8740.16,2480.32 8740.16,2401.57 8818.9,2401.57 8818.9,2480.32
  region net +36V: 7755.91,4173.23 7755.91,4094.49 7834.65,4094.49 7834.65,4173.23
  region net BrRght: 7460.63,3415.35 7460.63,3336.61 7539.37,3336.61 7539.37,3415.35
  region net +36V: 7165.35,3858.27 7165.35,3779.53 7244.09,3779.53 7244.09,3858.27
  region net +36V: 6732.28,3858.27 6732.28,3779.53 6811.02,3779.53 6811.02,3858.27

## Silkscreen, mask and mechanical layers (free items; w line width, h text height)
Top Overlay:
  text "GND" at 8139.76,4735.09 h70
  text "GND" at 4980.26,4635.83 h60 r90
  text "Micro Grid Tie Inverter" at 1447.01,4613 h216.54
  text "Prototype V1.0" at 1868.27,4462.97 h157.48
  text "GND" at 2923.23,4223.28 h70
  text "GND" at 3660.57,3897.64 h70 r90
  text "GND" at 4838.39,3870.12 h70 r90
  text "AC IN" at 1030,3711.11 h100
  text "GND" at 8897.64,3416.2 h70
  text "NULA" at 1280,3258.8 h100 r180
  text "GND" at 2303.75,3140.36 h70 r315
  text "GND" at 5923.18,3076.58 h70 r180
  text "GND" at 5944.88,2618.95 h70
  text "36V PWM" at 8958.8,2330 h100 r90
  text "GND" at 2746.06,1762.65 h70
  text "AC OUT" at 8968.8,1540 h100 r90
  text "Designed by:" at 1043.46,1469.31 h118.11
  text "Petar Ubavic" at 1043.46,1340.16 h118.11
  text "GND" at 1879.08,1338.58 h70 r90
  text "O" at 6477.32,1063.94 h10
Bottom Overlay:
  text "C" at 7214.57,4686.15 h100
  text "GND" at 7480.31,4686.24 h100
  text "A" at 6801.18,4685.04 h100
  text "B" at 6998.03,4685.04 h100

## Text inside footprints (layer, text, board x,y; h text height)
T1: Top Overlay "*" at 1062.99,2952.76 h70; Mechanical 13 "*" at 1168.6,2738.71 h70
U8: Top Overlay "*" at 6817.45,3275.76 h70 r90; Mechanical 13 "*" at 6863.95,3329.51 h70 r90